# EAGLE board CT_schematic (EAGLE 7.6.0)

Size 100 x 80 mm. Coordinates in mm from the lower left corner, seen from the top.
Outline: 0,0 100,0 100,80 0,80 0,0
Copper layers (1*16): Top 0.035mm / dielectric 1.5mm / Bottom 0.035mm
Design rules "default": minimum track width 10mil, minimum drill 24mil, track to track 8mil, track to pad 8mil, pad to pad 8mil, via to via 8mil, smd to smd 8mil, copper to edge 40mil, drill to drill 8mil, minimum pad ring 10mil, minimum via ring 8mil, stop-mask expansion 4mil, vias tented up to drill 0mil, thermal gap 10mil

## Footprints (pad centres in the part's own frame; a part is rotated, then mirrored left to right if it is on the bottom)
C0603 = smd 0.8 x 0.8: 1 -0.762,0; 2 0.762,0
C0402 = smd 0.5 x 0.5: 1 -0.508,0; 2 0.508,0
C0805 = smd 1.2 x 1.3: 1 -1.016,0; 2 1.016,0
C1210 = smd 1.2 x 2.5: 1 -1.524,0; 2 1.524,0
C1206 = smd 1.3 x 1.6: 1 -1.524,0; 2 1.524,0
L0603 = smd 0.8 x 0.8: 1 -0.762,0; 2 0.762,0
DR1040 = smd 1.6 x 3.2: 1 -4.458,0; 2 4.458,0
R0603 = smd 0.8 x 0.8: 1 -0.762,0; 2 0.762,0
LQFP100 = smd 0.3 x 1.2: 1 -6,-7.75; 2 -5.5,-7.75; 3 -5,-7.75; 4 -4.5,-7.75; 5 -4,-7.75; 6 -3.5,-7.75; 7 -3,-7.75; 8 -2.5,-7.75; 9 -2,-7.75; 10 -1.5,-7.75; 11 -1,-7.75; 12 -0.5,-7.75; 13 0,-7.75; 14 0.5,-7.75; 15 1,-7.75; 16 1.5,-7.75; 17 2,-7.75; 18 2.5,-7.75; 19 3,-7.75; 20 3.5,-7.75; 21 4,-7.75; 22 4.5,-7.75; 23 5,-7.75; 24 5.5,-7.75; 25 6,-7.75; 51 6,7.75; 52 5.5,7.75; 53 5,7.75; 54 4.5,7.75; 55 4,7.75; 56 3.5,7.75; 57 3,7.75; 58 2.5,7.75; 59 2,7.75; 60 1.5,7.75; 61 1,7.75; 62 0.5,7.75; 63 0,7.75; 64 -0.5,7.75; 65 -1,7.75; 66 -1.5,7.75; 67 -2,7.75; 68 -2.5,7.75; 69 -3,7.75; 70 -3.5,7.75; 71 -4,7.75; 72 -4.5,7.75; 73 -5,7.75; 74 -5.5,7.75; 75 -6,7.75 | smd 1.2 x 0.3: 26 7.75,-6; 27 7.75,-5.5; 28 7.75,-5; 29 7.75,-4.5; 30 7.75,-4; 31 7.75,-3.5; 32 7.75,-3; 33 7.75,-2.5; 34 7.75,-2; 35 7.75,-1.5; 36 7.75,-1; 37 7.75,-0.5; 38 7.75,0; 39 7.75,0.5; 40 7.75,1; 41 7.75,1.5; 42 7.75,2; 43 7.75,2.5; 44 7.75,3; 45 7.75,3.5; 46 7.75,4; 47 7.75,4.5; 48 7.75,5; 49 7.75,5.5; 50 7.75,6; 76 -7.75,6; 77 -7.75,5.5; 78 -7.75,5; 79 -7.75,4.5; 80 -7.75,4; 81 -7.75,3.5; 82 -7.75,3; 83 -7.75,2.5; 84 -7.75,2; 85 -7.75,1.5; 86 -7.75,1; 87 -7.75,0.5; 88 -7.75,0; 89 -7.75,-0.5; 90 -7.75,-1; 91 -7.75,-1.5; 92 -7.75,-2; 93 -7.75,-2.5; 94 -7.75,-3; 95 -7.75,-3.5; 96 -7.75,-4; 97 -7.75,-4.5; 98 -7.75,-5; 99 -7.75,-5.5; 100 -7.75,-6
VFBGA-63 = smd 0.4 x 0.4: A1 -3.6,4.4; A2 -2.8,4.4; A9 2.8,4.4; A10 3.6,4.4; B1 -3.6,3.6; B9 2.8,3.6; B10 3.6,3.6; C3 -2,2.8; C4 -1.2,2.8; C5 -0.4,2.8; C6 0.4,2.8; C7 1.2,2.8; C8 2,2.8; D3 -2,2; D4 -1.2,2; D5 -0.4,2; D6 0.4,2; D7 1.2,2; D8 2,2; E3 -2,1.2; E4 -1.2,1.2; E5 -0.4,1.2; E6 0.4,1.2; E7 1.2,1.2; E8 2,1.2; F3 -2,0.4; F4 -1.2,0.4; F5 -0.4,0.4; F6 0.4,0.4; F7 1.2,0.4; F8 2,0.4; G3 -2,-0.4; G4 -1.2,-0.4; G5 -0.4,-0.4; G6 0.4,-0.4; G7 1.2,-0.4; G8 2,-0.4; H3 -2,-1.2; H4 -1.2,-1.2; H5 -0.4,-1.2; H6 0.4,-1.2; H7 1.2,-1.2; H8 2,-1.2; J3 -2,-2; J4 -1.2,-2; J5 -0.4,-2; J6 0.4,-2; J7 1.2,-2; J8 2,-2; K3 -2,-2.8; K4 -1.2,-2.8; K5 -0.4,-2.8; K6 0.4,-2.8; K7 1.2,-2.8; K8 2,-2.8; L1 -3.6,-3.6; L2 -2.8,-3.6; L9 2.8,-3.6; L10 3.6,-3.6; M1 -3.6,-4.4; M2 -2.8,-4.4; M9 2.8,-4.4; M10 3.6,-4.4
WNG008 = smd 0.45 x 0.55: 1 -1.27,0; 2 0,0; 3 1.27,0; 4 2.54,0; 5 2.54,7.5; 6 1.27,7.5; 7 0,7.5; 8 -1.27,7.53 | smd 4.9 x 4.75: PAD 0.635,3.75
QFN-32 = smd 0.6 x 0.3: 1 -2.3,1.75; 2 -2.3,1.25; 3 -2.3,0.75; 4 -2.3,0.25; 5 -2.3,-0.25; 6 -2.3,-0.75; 7 -2.3,-1.25; 8 -2.3,-1.75; 17 2.3,-1.75; 18 2.3,-1.25; 19 2.3,-0.75; 20 2.3,-0.25; 21 2.3,0.25; 22 2.3,0.75; 23 2.3,1.25; 24 2.3,1.75 | smd 0.3 x 0.6: 9 -1.75,-2.3; 10 -1.25,-2.3; 11 -0.75,-2.3; 12 -0.25,-2.3; 13 0.25,-2.3; 14 0.75,-2.3; 15 1.25,-2.3; 16 1.75,-2.3; 25 1.75,2.3; 26 1.25,2.3; 27 0.75,2.3; 28 0.25,2.3; 29 -0.25,2.3; 30 -0.75,2.3; 31 -1.25,2.3; 32 -1.75,2.3 | smd 3.2 x 3.2: EXP 0,0
SJ-43515TS-SMT-TR = smd 2.2 x 3: 1 0.6,-7.4; 4 3.4,-7.4 | smd 3 x 3: 2 12.8,-7.4; 5 17,-3 | smd 2 x 3: 3 5.3,0; 6 2.5,0 | drill 1.8: P$7 4.5,-3.69; P$8 11.54,-3.69
WM-64PC = drill 0.6 pad 1: 1 -1,0.95; 2 -1,-0.95
SOIC-8 = smd 1.6 x 0.6: 1 -2.7,1.905 | smd 1.55 x 0.6: 2 -2.7,0.635; 3 -2.7,-0.635; 4 -2.7,-1.905; 5 2.7,-1.905; 6 2.7,-0.635; 7 2.7,0.635; 8 2.7,1.905
182-009-MALE = drill 1.194 pad 1.524 octagon: 1 -5.537,10.923; 2 -2.769,10.923; 3 0,10.923; 4 2.769,10.923; 5 5.537,10.923; 6 -4.153,8.08; 7 -1.384,8.08; 8 1.384,8.08; 9 4.153,8.08 | hole 3.048: -12.446,9.501; 12.446,9.501
FCI_10118193-0001LF = smd 0.4 x 1.35: 1 -1.3,2.675; 2 -0.65,2.675; 3 0,2.675; 4 0.65,2.675; 5 1.3,2.675 | smd 1.6 x 1.4: 6 -3.2,2.45; 7 3.2,2.45 | smd 1.9 x 1.9: 8 -1.2,0; 9 1.2,0 | hole 0.5: -3.3,0; 3.3,0
SOT143B = smd 1 x 0.7: 1 -0.75,-1 | smd 0.6 x 0.7: 2 0.95,-1; 3 0.95,1; 4 -0.95,1
ABS07-32.768KHZ-7-T = smd 1.1 x 2.4: 1 -2.5,0; 2 0,0
ASFL1 = smd 1.7 x 1.5: 1 -1.27,-1.1; 2 1.27,-1.1; 3 1.27,1.1; 4 -1.27,1.1
TSOT-23-5 = smd 1.3 x 0.62: 1 -1.31,0.95; 2 -1.31,0; 3 -1.31,-0.95; 4 1.31,-0.95; 5 1.31,0.95
SOIC-8_EP = smd 1.6 x 0.533: 1 -2.921,1.905; 2 -2.921,0.635; 3 -2.921,-0.635; 4 -2.921,-1.905; 5 2.921,-1.905; 6 2.921,-0.635; 7 2.921,0.635; 8 2.921,1.905 | smd 2.54 x 3.302: EPAD 0,0 | drill 0.406 pad 0.406: P$1 -0.508,0.635; P$2 0.381,0.635; P$3 -0.508,-0.635; P$4 0.381,-0.635
DFN8_2X3MC = smd 0.813 x 0.305: 1 -1.398,0.75; 2 -1.398,0.25; 3 -1.398,-0.25; 4 -1.398,-0.75; 5 1.398,-0.75; 6 1.398,-0.25; 7 1.398,0.25; 8 1.398,0.75 | smd 1.753 x 1.549: 9 0,0
JST-2-SMD = smd 1 x 4.6: 1 -1,-3.7; 2 1,-3.7 | smd 1.6 x 3.4: NC1 -3.4,1.5; NC2 3.4,1.5
SON-6 = smd 0.55 x 0.3: 1 -0.355,0.5 | smd 0.52 x 0.3: 2 -0.37,0; 3 -0.37,-0.5; 4 0.37,-0.5; 5 0.37,0; 6 0.37,0.5
DCU0008A_N = smd 0.5 x 0.3: 1 -1.6,0.75; 2 -1.6,0.25; 3 -1.6,-0.25; 4 -1.6,-0.75; 5 1.6,-0.75; 6 1.6,-0.25; 7 1.6,0.25; 8 1.6,0.75
SW_4-1437565-2 = smd 1.4 x 2.1: 1 -2.23,4.55; 2 -2.23,-4.55; 3 2.23,4.55; 4 2.23,-4.55
LGM67K-G1J2-24-Z = smd 0.8 x 1.4: A -2,0; C 0,0
NC7SZ125M5X = smd 1.3 x 0.7: 1 -1.3,0.95; 2 -1.3,0; 3 -1.3,-0.95; 4 1.3,-0.95; 5 1.3,0.95

## Placement (x,y rotation side)
C1  1e-06  [C0603]  -59.69,85.09 0 top  (outside the outline)
C2  1e-07  [C0603]  -63.5,85.09 0 top  (outside the outline)
C3  1e-07  [C0603]  -67.31,85.09 0 top  (outside the outline)
C4  1e-07  [C0603]  -71.12,85.09 0 top  (outside the outline)
C5  1e-07  [C0603]  -74.93,85.09 0 top  (outside the outline)
C6  1e-07  [C0603]  -78.74,85.09 0 top  (outside the outline)
C7  1e-07  [C0603]  -82.55,85.09 0 top  (outside the outline)
C8  4.7e-06  [C0603]  -44.45,85.09 0 top  (outside the outline)
C9  2.2e-06  [C0603]  -48.26,85.09 0 top  (outside the outline)
C10  2.2e-06  [C0603]  -52.07,85.09 0 top  (outside the outline)
C11  1e-08  [C0603]  -86.36,85.09 0 top  (outside the outline)
C12  1e-06  [C0603]  -90.17,85.09 0 top  (outside the outline)
C13  1e-11  [C0402]  -83.82,90.17 0 top  (outside the outline)
C14  1e-11  [C0402]  -87.63,90.17 0 top  (outside the outline)
C15  1e-06  [C0603]  -15.24,90.17 0 top  (outside the outline)
C16  1e-06  [C0603]  -19.05,90.17 0 top  (outside the outline)
C17  1e-07  [C0402]  -91.44,90.17 0 top  (outside the outline)
C18  1e-07  [C0402]  -15.24,95.25 0 top  (outside the outline)
C19  1e-07  [C0402]  -19.05,95.25 0 top  (outside the outline)
C20  1e-07  [C0402]  -22.86,95.25 0 top  (outside the outline)
C21  2.2e-06  [C0603]  -55.88,85.09 0 top  (outside the outline)
C22  1e-08  [C0402]  -26.67,95.25 0 top  (outside the outline)
C23  1e-06  [C0603]  -22.86,90.17 0 top  (outside the outline)
C24  1e-06  [C0603]  -26.67,90.17 0 top  (outside the outline)
C25  1e-06  [C0603]  -30.48,90.17 0 top  (outside the outline)
C26  1e-06  [C0603]  -34.29,90.17 0 top  (outside the outline)
C27  1e-06  [C0603]  -38.1,90.17 0 top  (outside the outline)
C28  1e-06  [C0603]  -41.91,90.17 0 top  (outside the outline)
C29  1e-06  [C0603]  -45.72,90.17 0 top  (outside the outline)
C30  1e-07  [C0402]  -30.48,95.25 0 top  (outside the outline)
C31  1e-07  [C0402]  -34.29,95.25 0 top  (outside the outline)
C32  1e-07  [C0402]  -38.1,95.25 0 top  (outside the outline)
C33  1e-07  [C0402]  -41.91,95.25 0 top  (outside the outline)
C34  1e-06  [C0603]  -49.53,90.17 0 top  (outside the outline)
C35  1e-07  [C0402]  -45.72,95.25 0 top  (outside the outline)
C36  1e-08  [C0402]  -49.53,95.25 0 top  (outside the outline)
C37  1e-08  [C0402]  -53.34,95.25 0 top  (outside the outline)
C38  1e-05  [C0805]  -81.28,73.66 0 top  (outside the outline)
C39  1e-05  [C0805]  -86.36,73.66 0 top  (outside the outline)
C40  1e-05  [C1210]  -38.1,73.66 0 top  (outside the outline)
C41  1e-05  [C1210]  -44.45,73.66 0 top  (outside the outline)
C42  1e-05  [C1210]  -50.8,73.66 0 top  (outside the outline)
C43  1e-05  [C1210]  -57.15,73.66 0 top  (outside the outline)
C44  1e-07  [C0402]  -57.15,95.25 0 top  (outside the outline)
C45  1e-05  [C1206]  -63.5,73.66 0 top  (outside the outline)
C46  1e-05  [C1206]  -69.85,73.66 0 top  (outside the outline)
C47  1e-08  [C0402]  -60.96,95.25 0 top  (outside the outline)
C48  1e-07  [C0402]  -64.77,95.25 0 top  (outside the outline)
C49  1e-08  [C0402]  -68.58,95.25 0 top  (outside the outline)
C50  1e-07  [C0402]  -72.39,95.25 0 top  (outside the outline)
C51  1e-08  [C0402]  -76.2,95.25 0 top  (outside the outline)
F1  240.0  [L0603]  -53.34,90.17 0 top  (outside the outline)
I1  3.8e-06  [DR1040]  -76.2,41.91 0 top  (outside the outline)
R2  1000.0  [R0603]  -57.15,90.17 0 top  (outside the outline)
R4  4700.0  [R0603]  -60.96,90.17 0 top  (outside the outline)
R5  10000.0  [R0603]  -60.96,80.01 0 top  (outside the outline)
R6  10000.0  [R0603]  -66.04,80.01 0 top  (outside the outline)
R7  10000.0  [R0603]  -71.12,80.01 0 top  (outside the outline)
R8  10000.0  [R0603]  -76.2,80.01 0 top  (outside the outline)
R9  10000.0  [R0603]  -81.28,80.01 0 top  (outside the outline)
R10  10000.0  [R0603]  -86.36,80.01 0 top  (outside the outline)
R11  10000.0  [R0603]  -91.44,80.01 0 top  (outside the outline)
R12  10000.0  [R0603]  -15.24,85.09 0 top  (outside the outline)
R13  10000.0  [R0603]  -20.32,85.09 0 top  (outside the outline)
R14  1270.0  [R0603]  -64.77,90.17 0 top  (outside the outline)
R15  1270.0  [R0603]  -68.58,90.17 0 top  (outside the outline)
R16  120.0  [R0603]  -72.39,90.17 0 top  (outside the outline)
R17  100000.0  [R0603]  -35.56,80.01 0 top  (outside the outline)
R18  490000.0  [R0603]  -40.64,80.01 0 top  (outside the outline)
R19  1000000.0  [R0603]  -30.48,80.01 0 top  (outside the outline)
R20  4031.5447154472  [R0603]  -25.4,80.01 0 top  (outside the outline)
R21  2200.0  [R0603]  -76.2,90.17 0 top  (outside the outline)
R22  10000.0  [R0603]  -25.4,85.09 0 top  (outside the outline)
R23  10000.0  [R0603]  -30.48,85.09 0 top  (outside the outline)
R24  82000.0  [R0603]  -35.56,85.09 0 top  (outside the outline)
R25  300000.0  [R0603]  -45.72,80.01 0 top  (outside the outline)
R26  120000.0  [R0603]  -50.8,80.01 0 top  (outside the outline)
R27  2000.0  [R0603]  -80.01,90.17 0 top  (outside the outline)
R28  10000.0  [R0603]  -40.64,85.09 0 top  (outside the outline)
R29  200000.0  [R0603]  -55.88,80.01 0 top  (outside the outline)
U1  stm32f405VGT7  [LQFP100]  -63.5,8.89 0 top  (outside the outline)
U2  mt29f4g08abbdah4  [VFBGA-63]  -45.72,43.18 0 top  (outside the outline)
U3  S25FL128SDPNFI001  [WNG008]  -29.21,53.34 0 top  (outside the outline)
U4  SGTL5000XNAA3  [QFN-32]  -68.58,55.88 0 top  (outside the outline)
U5  SJ-43515TS-SMT-TR  [SJ-43515TS-SMT-TR]  -39.37,31.75 0 top  (outside the outline)
U6  SJ-43515TS-SMT-TR  [SJ-43515TS-SMT-TR]  -67.31,31.75 0 top  (outside the outline)
U7  SJ-43515TS-SMT-TR  [SJ-43515TS-SMT-TR]  -39.37,45.72 0 top  (outside the outline)
U8  WM-64PCT  [WM-64PC]  -54.61,55.88 0 top  (outside the outline)
U9  SN65HVD230D  [SOIC-8]  -82.55,55.88 0 top  (outside the outline)
U10  182-009-113R531  [182-009-MALE]  -36.83,6.35 0 top  (outside the outline)
U11  10118193-0001LF  [FCI_10118193-0001LF]  -53.34,64.77 0 top  (outside the outline)
U12  prtr5v0u2ax  [SOT143B]  -88.9,95.25 0 top  (outside the outline)
U13  10118193-0001LF  [FCI_10118193-0001LF]  -63.5,64.77 0 top  (outside the outline)
U14  prtr5v0u2ax  [SOT143B]  -24.13,100.33 0 top  (outside the outline)
U15  ABS07-32.768KHZ-7-T  [ABS07-32.768KHZ-7-T]  -83.82,64.77 0 top  (outside the outline)
U16  ASFL-24.57MHZ-NCS  [ASFL1]  -27.94,66.04 0 top  (outside the outline)
U17  ASFL1-25MHZ-NCS  [ASFL1]  -44.45,66.04 0 top  (outside the outline)
U18  ltc3406es5  [TSOT-23-5]  -15.24,80.01 0 top  (outside the outline)
U19  MIC5234YME  [SOIC-8_EP]  -17.78,73.66 0 top  (outside the outline)
U20  MCP73831T-2ACI/MC  [DFN8_2X3MC]  -48.26,99.06 0 top  (outside the outline)
U21  S2B-PH-SM4-TB(LF)(SN)  [JST-2-SMD]  -41.91,57.15 0 top  (outside the outline)
U22  TPS3895ADRYR  [SON-6]  -41.91,99.06 0 top  (outside the outline)
U23  LSF0102DCTR  [DCU0008A_N]  -36.83,99.06 0 top  (outside the outline)
U24  4-1437565-2  [SW_4-1437565-2]  -66.04,43.18 0 top  (outside the outline)
U25  Q65110A2395  [LGM67K-G1J2-24-Z]  -26.67,73.66 0 top  (outside the outline)
U26  nc7sz125m5x  [NC7SZ125M5X]  -74.93,72.39 0 top  (outside the outline)

## Library data of the parts
C1-C51 F1 I1 R2 R4-R29 U1-U26 = circuit_tree

## Nets
CLK_CRYSTAL_U1_8: C13.1 U1.8 U15.1
CLK_CRYSTAL_U1_9: C14.1 U1.9 U15.2
CLK_U1_12: U1.12 U17.3
CLK_U4_21: U4.21 U16.3
GND: C1.2 C2.2 C3.2 C4.2 C5.2 C6.2 C7.2 C8.2 C9.2 C10.2 C11.2 C12.2 C13.2 C14.2 C15.2 C16.2 C17.2 C18.2 C19.2 C20.2 C21.2 C22.2 C30.2 C31.2 C32.2 C33.2 C34.2 C35.2 C36.2 C37.2 C38.2 C39.1 C39.2 C40.2 C41.2 C42.2 C43.2 C44.2 C45.2 C46.2 C47.2 C48.2 C49.2 C50.2 C51.2 R2.2 R5.2 R15.2 R17.2 R18.2 R21.2 R24.2 R26.2 R27.2 U1.10 U1.20 U1.27 U1.52 U1.70 U1.74 U1.99 U2.C5 U2.F7 U2.K3 U2.K8 U3.4 U3.PAD U4.1 U4.3 U4.7 U4.EXP U6.1 U7.1 U8.2 U9.2 U10.5 U11.5 U11.6 U11.7 U11.8 U11.9 U12.1 U13.5 U13.6 U13.7 U13.8 U13.9 U14.1 U16.2 U17.2 U18.2 U19.7 U19.EPAD U20.6 U20.9 U21.2 U22.2 U23.1 U25.C U26.1 U26.3
INPUT_USBPOWER_5V: C16.1 C45.1 R28.2 U1.52 U11.1 U12.4 U20.1 U20.2
NET_U1_14: R4.1 U1.14 U26.4
NET_U1_22: C11.1 C12.1 F1.1 U1.21 U1.22
NET_U1_49: C9.1 U1.49
NET_U1_73: C10.1 U1.73
NET_U1_94: R5.1 U1.94
NET_U1_97: U25.A
NET_U1_98: U24.3 U24.4
NET_U2_C3: R10.1 U2.C3
NET_U3_3: R11.1 U3.3
NET_U3_7: R13.1 U3.7
NET_U4_10: C33.1 U4.10
NET_U4_29: R14.1 U4.29
NET_U4_31: R15.1 U4.31
NET_U5_1: U4.4 U5.1
NET_U5_2: U4.2 U5.2
NET_U5_5: U4.6 U5.5
NET_U6_2: C24.1 U6.2
NET_U6_5: C23.1 U6.5
NET_U6_11: C24.2
NET_U6_12: C23.2
NET_U7_2: C26.1 C27.1 U7.2
NET_U7_5: C25.1 U7.5
NET_U7_13: C26.2 C27.2
NET_U7_14: C25.2
NET_U8_1: C28.1 C29.1 C34.1 U4.16 U8.1
NET_U8_15: C28.2 C29.2
NET_U9_6: R16.2 U9.6
NET_U9_8: R17.1 U9.8
NET_U10_2: R16.2 U9.6 U10.2
NET_U10_3: R16.1 U9.7 U10.3
NET_U18_1: U18.1
NET_U18_3: I1.1 U18.3
NET_U18_5: R18.1 R19.1 U18.5
NET_U18_ATNET_3: I1.2 R19.2
NET_U19_4: R20.2 R21.1 U19.4
NET_U20_5: R28.1 U20.5
NET_U20_8: R27.1 U20.8
NET_U22_1: R23.1 R24.1 U22.1
NET_U22_3: R25.2 R26.1 U22.3
NET_U22_4: R22.1 U22.4 U26.2
NET_U23_8: R29.1 U23.8
NET_U24_1: R2.1 U24.1 U24.2
PROC_CAN1_RX_TOIOBUF: U23.4
PROC_CAN1_RX_TOXCVR: U9.4 U23.5
PROC_CAN1_TX_TOIOBUF: U23.3
PROC_CAN1_TX_TOXCVR: U9.1 U23.6
PROC_FSMC_D0: U1.61 U2.H4
PROC_FSMC_D1: U1.62 U2.J4
PROC_FSMC_D2: U1.81 U2.K4
PROC_FSMC_D3: U1.82 U2.K5
PROC_FSMC_D4: U1.38 U2.K6
PROC_FSMC_D5: U1.39 U2.J7
PROC_FSMC_D6: U1.40 U2.K7
PROC_FSMC_D7: U1.41 U2.J8
PROC_FSMC_NCE2: R7.1 U1.88 U2.C6
PROC_FSMC_NOE: R9.1 U1.85 U2.D4
PROC_FSMC_NWAIT: R6.1 U1.87 U2.C8
PROC_FSMC_NWE: R8.1 U1.86 U2.C7
PROC_I2S2_CK: U1.47 U4.24
PROC_I2S2_EXT_SD: U1.17 U4.25
PROC_I2S2_SD: U1.18 U4.26
PROC_I2S2_WS: U1.51 U4.23
PROC_SPI1_MISO: U1.31 U3.2
PROC_SPI1_MOSI: U1.32 U3.5
PROC_SPI1_NSS: R12.1 U1.29 U3.1
PROC_SPI1_SCK: U1.30 U3.6
PROC_USB_OTG_FS_DM: U1.70 U13.2 U14.3
PROC_USB_OTG_FS_DP: U1.71 U13.3 U14.2
PROC_USB_OTG_FS_VBUS: C15.1 U1.68 U13.1 U14.4
PROC_USB_OTG_HS_DM: U1.53 U11.2 U12.3
PROC_USB_OTG_HS_DP: U1.54 U11.3 U12.2
VCC_S1_3V7: C38.1 C40.1 C41.1 C46.1 U18.4 U19.5 U19.8 U20.3 U20.4 U21.1
VCC_TIER1_1V8: C1.1 C2.1 C3.1 C4.1 C5.1 C6.1 C7.1 C8.1 C17.1 C18.1 C19.1 C20.1 C21.1 C22.1 C30.1 C31.1 C32.1 C39.2 C44.1 C49.1 C50.1 C51.1 F1.2 I1.2 R4.2 R6.2 R7.2 R8.2 R9.2 R10.2 R11.2 R12.2 R13.2 R14.2 R19.2 R22.2 R23.2 R25.1 U1.6 U1.11 U1.19 U1.28 U1.50 U1.75 U1.100 U2.D3 U2.G4 U2.H8 U2.J6 U3.8 U4.5 U4.20 U4.30 U22.6 U23.2 U26.5
VCC_TIER1_3V3: C35.1 C36.1 C37.1 C42.1 C43.1 C47.1 C48.1 R20.1 R29.2 U9.3 U16.4 U17.4 U19.1 U23.7

## Tracks (layer width: path | path; a pad name or v marks a point on that pad's centre or on a via)
CLK_CRYSTAL_U1_8  (2 unrouted)
CLK_CRYSTAL_U1_9  (2 unrouted)
CLK_U1_12  (1 unrouted)
CLK_U4_21  (1 unrouted)
GND  (100 unrouted)
INPUT_USBPOWER_5V  (7 unrouted)
NET_U1_14  (2 unrouted)
NET_U1_22  (4 unrouted)
NET_U1_49  (1 unrouted)
NET_U1_73  (1 unrouted)
NET_U1_94  (1 unrouted)
NET_U1_98  (1 unrouted)
NET_U2_C3  (1 unrouted)
NET_U3_3  (1 unrouted)
NET_U3_7  (1 unrouted)
NET_U4_10  (1 unrouted)
NET_U4_29  (1 unrouted)
NET_U4_31  (1 unrouted)
NET_U5_1  (1 unrouted)
NET_U5_2  (1 unrouted)
NET_U5_5  (1 unrouted)
NET_U6_2  (1 unrouted)
NET_U6_5  (1 unrouted)
NET_U7_2  (2 unrouted)
NET_U7_5  (1 unrouted)
NET_U7_13  (1 unrouted)
NET_U8_1  (4 unrouted)
NET_U8_15  (1 unrouted)
NET_U9_6  (1 unrouted)
NET_U9_8  (1 unrouted)
NET_U10_2  (2 unrouted)
NET_U10_3  (2 unrouted)
NET_U18_3  (1 unrouted)
NET_U18_5  (2 unrouted)
NET_U18_ATNET_3  (1 unrouted)
NET_U19_4  (2 unrouted)
NET_U20_5  (1 unrouted)
NET_U20_8  (1 unrouted)
NET_U22_1  (2 unrouted)
NET_U22_3  (2 unrouted)
NET_U22_4  (2 unrouted)
NET_U23_8  (1 unrouted)
NET_U24_1  (2 unrouted)
PROC_CAN1_RX_TOXCVR  (1 unrouted)
PROC_CAN1_TX_TOXCVR  (1 unrouted)
PROC_FSMC_D0  (1 unrouted)
PROC_FSMC_D1  (1 unrouted)
PROC_FSMC_D2  (1 unrouted)
PROC_FSMC_D3  (1 unrouted)
PROC_FSMC_D4  (1 unrouted)
PROC_FSMC_D5  (1 unrouted)
PROC_FSMC_D6  (1 unrouted)
PROC_FSMC_D7  (1 unrouted)
PROC_FSMC_NCE2  (2 unrouted)
PROC_FSMC_NOE  (2 unrouted)
PROC_FSMC_NWAIT  (2 unrouted)
PROC_FSMC_NWE  (2 unrouted)
PROC_I2S2_CK  (1 unrouted)
PROC_I2S2_EXT_SD  (1 unrouted)
PROC_I2S2_SD  (1 unrouted)
PROC_I2S2_WS  (1 unrouted)
PROC_SPI1_MISO  (1 unrouted)
PROC_SPI1_MOSI  (1 unrouted)
PROC_SPI1_NSS  (2 unrouted)
PROC_SPI1_SCK  (1 unrouted)
PROC_USB_OTG_FS_DM  (2 unrouted)
PROC_USB_OTG_FS_DP  (2 unrouted)
PROC_USB_OTG_FS_VBUS  (3 unrouted)
PROC_USB_OTG_HS_DM  (2 unrouted)
PROC_USB_OTG_HS_DP  (2 unrouted)
VCC_S1_3V7  (9 unrouted)
VCC_TIER1_1V8  (55 unrouted)
VCC_TIER1_3V3  (13 unrouted)